# Altium PCB 555_timer.PcbDoc
Units mil, origin at the board's own origin, x right, y up, seen from the top; angles counter-clockwise.
Board outline 1210 x 595 mil, 2 copper layers (Top Layer, Bottom Layer); 7 components, 6 nets, 20 pads, 1 vias.
Unrouted connection lines stored in the file: 1.
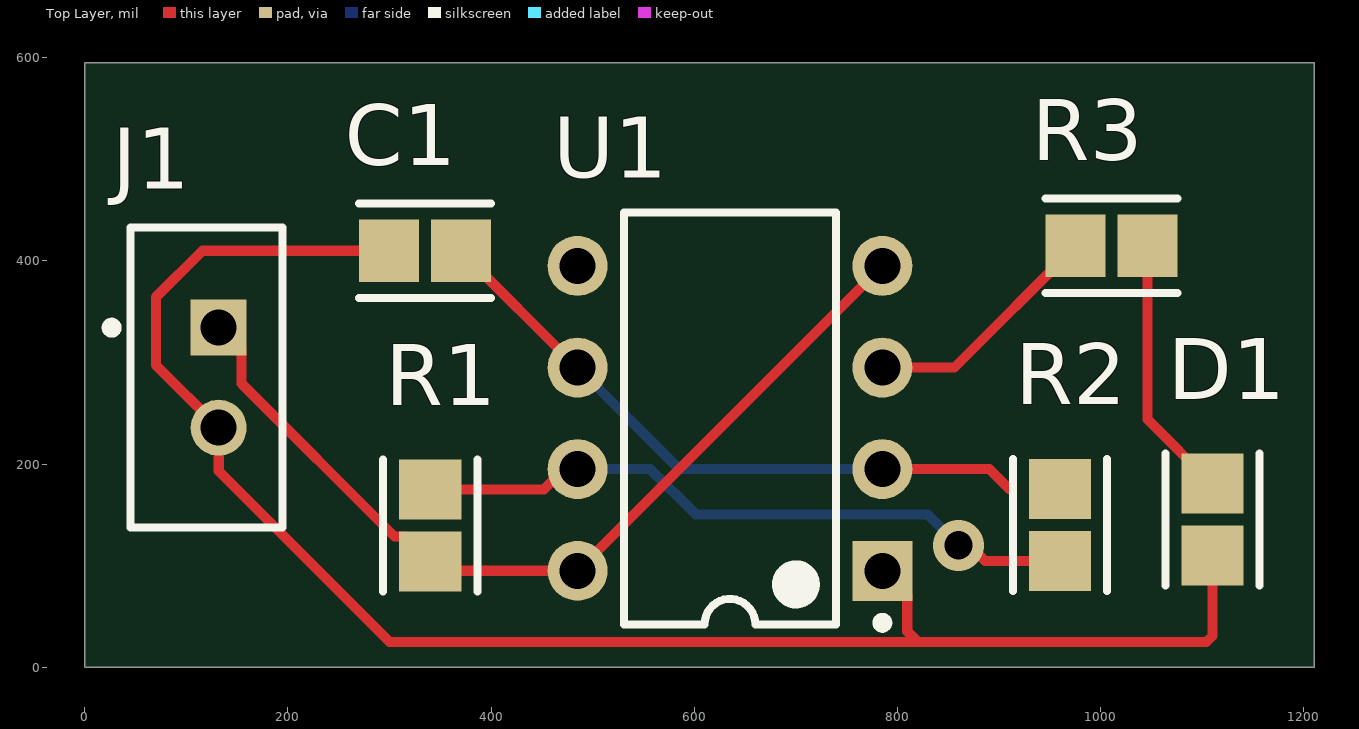
[diagram p0: Top Layer view]
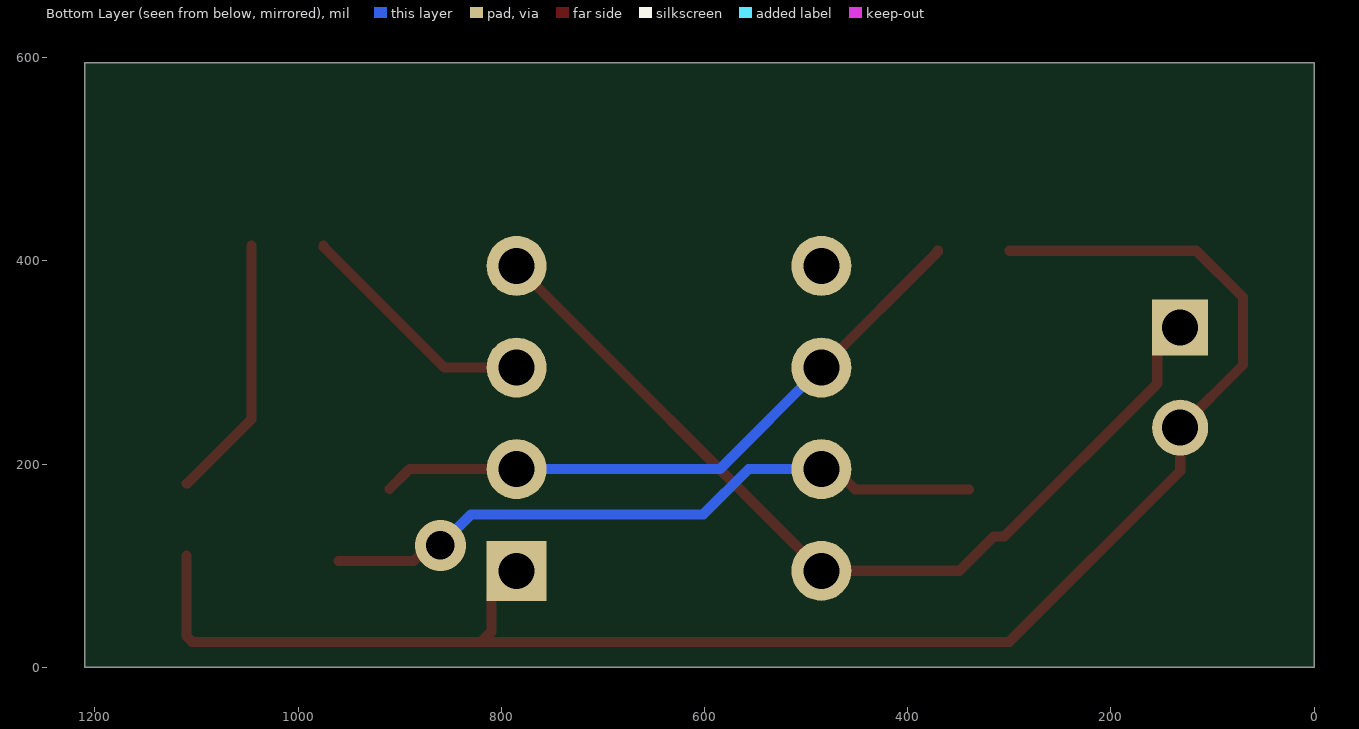
[diagram p1: Bottom Layer view, seen from below]
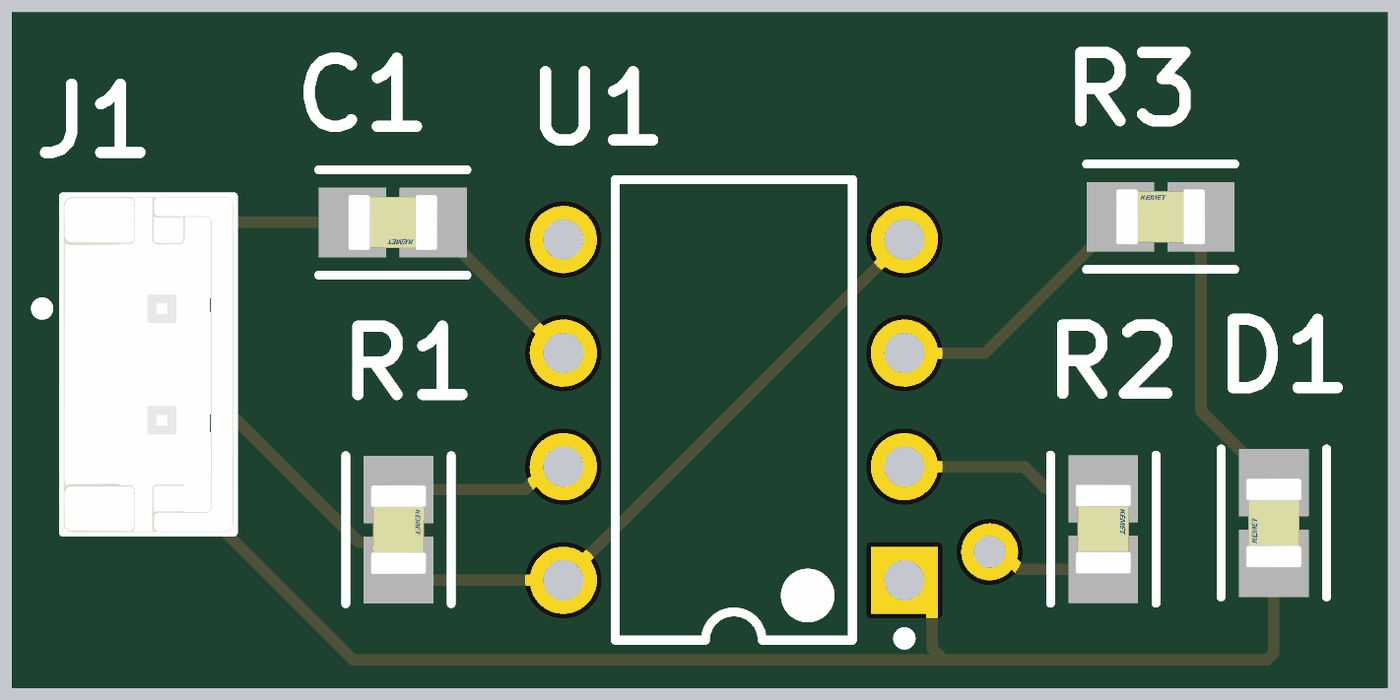
[diagram p2: 3D render of the assembled board from above, using the file's embedded part models]

## Layer stack, top to bottom
Top Solder: solder mask 0.4, Solder Resist, Dk 3.5
Top Layer: signal copper 1.4
Dielectric 1: dielectric 12.6, FR-4, Dk 4.8
Bottom Layer: signal copper 1.4
Bottom Solder: solder mask 0.4, Solder Resist, Dk 3.5

## Board outline
0,0 1210,0 1210,595 0,595

## Design rules (kind name [scope] priority, off if disabled: settings)
Clearance [All] p1: gap=10 ignorepadtopadclearanceinfootprint=FALSE except(0: Arc-Hole Track-Hole SMDPad-Hole THPad-Hole Via-Hole Fill-Hole Poly-Hole Region-Hole Text-Hole)
PolygonConnect [All] p1: connectstyle=Relief reliefconductorwidth=10 reliefentries=4 polygonreliefangle="90 Angle" airgapwidth=10
RoutingVias [All] p1: holewidth=28 width=50 viastyle="Through Hole" minholewidth=28 minwidth=50 maxholewidth=28 maxwidth=50
SolderMaskExpansion [All] p1: expansion=4 istentingtop=FALSE
Width [All] p1: maxlimit=10 minlimit=10 preferedwidth=10
30 further rules are at their usual default settings.

## Components (designator, comment, footprint, x,y, rotation, side; value= is the part's Value field where it differs from the comment)
C1 "10uF" FP-C0805C-DN-IPC_A 335,410 r180 top
D1 "Blue" FP-C0805C-DN-IPC_A 1110,145.46 r90 top
J1 "5V" FP-B2B-EH-A_LF_SN-MFG 120,285 r270 top
R1 "1k" FP-C0805C-DN-IPC_A 340,139.54 r270 top
R2 "10k" FP-C0805C-DN-IPC_A 960,140 r270 top
R3 "1k" FP-C0805C-DN-IPC_A 1010.46,415 r0 top
U1 "LM555" N08E 635,245 r180 top

## Footprints (in the part's own frame and the unit in brackets; to place one, negate y for a bottom-side part, rotate by r counter-clockwise, add the part's x,y. Pads: shape width x height; smd on the part's side, far side on the other; paste and mask are expansions set on the pad)
FP-B2B-EH-A_LF_SN-MFG [mm]
  rect 1.4x1.4 hole 0.9 paste-1000 mask+0: 1(-1.25,0.3)
  round 1.4 hole 0.9 paste-1000 mask+0: 2(1.25,0.3)
  silkscreen extent -3.75,-2.5 3.75,1.9, body extent -3.85,-2 3.85,2, height 0.25
FP-C0805C-DN-IPC_A [mil]
  rect 59.24x61.27 smd paste+0 mask+0: 1(-35.46,0) 2(35.46,0)
  silkscreen extent -65,-46 65,46, body extent -85,-50 85,50, height 10
N08E [mm] "DIP, 8-Pin, Row Spacing 7.62 mm, Pitch 2.54 mm"
  rect 1.5x1.5 hole 0.9: 1(-3.81,3.81)
  round 1.5 hole 0.9: 2(-3.81,1.27) 3(-3.81,-1.27) 4(-3.81,-3.81) 5(3.81,-3.81) 6(3.81,-1.27) 7(3.81,1.27) 8(3.81,3.81)
  silkscreen extent -3.94,-5.15 2.65,5.23, body extent -3.6,-5.15 3.6,5.15, height 5.33

## Part data
C1: library part GRM21BR61C106KE15L, "贴片电容（MLCC） 10μF ±10% 16V X5R 0805", Case Code (Imperial)=0805, Case Code (Metric)=2012, Dielectric=X5R, Manufacturer=Murata, Max Operating Temperature=85°C, Min Operating Temperature=-55°C, Package Quantity=1, Supplier Part Number 1=490-3886-1-ND, Tolerance=10%, Voltage=16V, Capacitance=10uF, Case/Package=0805, Category="Ceramic Capacitors", ComponentLink1Description=https://datasheet.ciiva.com/7719/1747468-7719090.pdf?src-supplier=Element14, ComponentLink1URL=https://datasheet.ciiva.com/7719/1747468-7719090.pdf?src-supplier=Element14, ComponentLink2Description=https://datasheet.ciiva.com/23628/460993-23628598.pdf?src-supplier=Newark, ComponentLink2URL=https://datasheet.ciiva.com/23628/460993-23628598.pdf?src-supplier=Newark, ComponentLink3Description=https://datasheet.ciiva.com/2989/product-2989696.pdf?src-supplier=Avnet, ComponentLink3URL=https://datasheet.ciiva.com/2989/product-2989696.pdf?src-supplier=Avnet, ComponentLink4Description=https://datasheet.ciiva.com/3777/1956grm21br61c106ke1523-3777137.pdf?src-supplier=Arrow+Electronics, ComponentLink4URL=https://datasheet.ciiva.com/3777/1956grm21br61c106ke1523-3777137.pdf?src-supplier=Arrow+Electronics, ComponentLink5Description=https://datasheet.ciiva.com/29202/450891-da-01-de-vs-chip-kond-0805-10-0-uf-10pr-16-0v-x5r-29202696.pdf?src-supplier=Conrad, ComponentLink5URL=https://datasheet.ciiva.com/29202/450891-da-01-de-vs-chip-kond-0805-10-0-uf-10pr-16-0v-x5r-29202696.pdf?src-supplier=Conrad, ComponentLink6Description=https://datasheet.ciiva.com/29199/454607-da-01-en-vs-kondensator-0805-29199611.pdf?src-supplier=Conrad, ComponentLink6URL=https://datasheet.ciiva.com/29199/454607-da-01-en-vs-kondensator-0805-29199611.pdf?src-supplier=Conrad, ComponentLink7Description=https://datasheet.ciiva.com/137/partnumbering-e-01-137918.pdf?src-supplier=Digi-Key, ComponentLink7URL=https://datasheet.ciiva.com/137/partnumbering-e-01-137918.pdf?src-supplier=Digi-Key, ComponentLink8Description=https://datasheet.ciiva.com/137/partnumbering-e-01-137917.pdf?src-supplier=Digi-Key, ComponentLink8URL=https://datasheet.ciiva.com/137/partnumbering-e-01-137917.pdf?src-supplier=Digi-Key, ComponentLink9Description=https://datasheet.ciiva.com/137/partnumbering-e-01-137919.pdf?src-supplier=Digi-Key, ComponentLink9URL=https://datasheet.ciiva.com/137/partnumbering-e-01-137919.pdf?src-supplier=Digi-Key, ComponentLink10Description=https://datasheet.ciiva.com/2989/product-2989697.pdf?src-supplier=Avnet, ComponentLink10URL=https://datasheet.ciiva.com/2989/product-2989697.pdf?src-supplier=Avnet, Construction=Flat, Depth=1.25mm, Height=1.25mm, Lead Free="Lead Free", Length=2mm, Manufacturer Part Number=GRM21BR61C106KE15L, Material=Ceramic, Mount="Surface Mount", Packaging="Tape and Reel", Pricing 1="1=0.18000, 10=0.12400, 50=0.07420, 100=0.06270, 500=0.04292, 1000=0.03798 (USD)", Radiation Hardening=No, REACH SVHC="No SVHC", RoHS=Yes, RoHS Compliant=Yes, Series=GRM, Stock 1=9508002, Supplier 1=Digi-Key, Termination=SMD/SMT, Thickness=0.053inch, Voltage Rating=16V, Voltage Rating (DC)=16V, Width=1.25mm
D1: library part LTST-C170TBKT, "LED BLUE CLEAR 0805 SMD", Case Code (Imperial)=0805, Case Code (Metric)=2012, Forward Current=20mA, Forward Voltage=3.8V, Lens Color=Colorless, Manufacturer="Vishay Lite-On", Max Operating Temperature=80°C, Min Operating Temperature=-20°C, Package Quantity=1, Power Dissipation=76mW, Reverse Voltage=5V, Supplier Part Number 1=160-1579-1-ND, Case/Package=0805, Category=LEDs, Color=Blue, ComponentLink1Description=https://datasheet.ciiva.com/27055/1996161-27055955.pdf?src-supplier=Jameco, ComponentLink1URL=https://datasheet.ciiva.com/27055/1996161-27055955.pdf?src-supplier=Jameco, ComponentLink2Description=https://datasheet.ciiva.com/11773/0900766b80dc0281-11773879.pdf?src-supplier=RSComponents, ComponentLink2URL=https://datasheet.ciiva.com/11773/0900766b80dc0281-11773879.pdf?src-supplier=RSComponents, ComponentLink3Description=https://datasheet.ciiva.com/12400/lite-on-ltst-c170tbkt-190169-12400787.pdf?src-supplier=Mouser, ComponentLink3URL=https://datasheet.ciiva.com/12400/lite-on-ltst-c170tbkt-190169-12400787.pdf?src-supplier=Mouser, ComponentLink4Description=https://datasheet.ciiva.com/16199/lite-on20ltst-c170tbkt-16199611.pdf?src-supplier=Future+Electronics, ComponentLink4URL=https://datasheet.ciiva.com/16199/lite-on20ltst-c170tbkt-16199611.pdf?src-supplier=Future+Electronics, ComponentLink5Description=https://datasheet.ciiva.com/15117/getdatasheetpartid-103986-15117447.pdf?src-supplier=Verical, ComponentLink5URL=https://datasheet.ciiva.com/15117/getdatasheetpartid-103986-15117447.pdf?src-supplier=Verical, ComponentLink6Description=https://datasheet.ciiva.com/25764/ltst-c170tbkt-25764828.pdf?src-supplier=Allied+Electronics, ComponentLink6URL=https://datasheet.ciiva.com/25764/ltst-c170tbkt-25764828.pdf?src-supplier=Allied+Electronics, ComponentLink7Description=https://datasheet.ciiva.com/2110/s-110-ltst-c170tbkt-2110489.pdf?src-supplier=Digi-Key, ComponentLink7URL=https://datasheet.ciiva.com/2110/s-110-ltst-c170tbkt-2110489.pdf?src-supplier=Digi-Key, ComponentLink8Description=https://datasheet.ciiva.com/2110/s-110-ltst-c170tbkt-2110488.pdf?src-supplier=Digi-Key, ComponentLink8URL=https://datasheet.ciiva.com/2110/s-110-ltst-c170tbkt-2110488.pdf?src-supplier=Digi-Key, ComponentLink9Description=https://datasheet.ciiva.com/2110/s-110-ltst-c170tbkt-2110490.pdf?src-supplier=Digi-Key, ComponentLink9URL=https://datasheet.ciiva.com/2110/s-110-ltst-c170tbkt-2110490.pdf?src-supplier=Digi-Key, Depth=1.25mm, Dominant Wavelength=475nm, Height=1.1mm, Illumination Color=Blue, Lead Free="Lead Free", Length=2mm, Lens Style=Diffused,Colorless,Clear,Rectangular, Lens Transparency=Clear, Luminous Intensity=180mcd, Manufacturer Part Number=LTST-C170TBKT, Mount="Surface Mount", Number of Elements=1, Number of LEDs=1, Number of Pins=2, Packaging="Tape and Reel", Power Rating=76mW, Pricing 1="1=0.36000, 10=0.23900, 100=0.15930, 500=0.11016, 1000=0.09180 (USD)", Radiation Hardening=No, RoHS=Yes, RoHS Compliant=Yes, Series=-, Stock 1=153274, Supplier 1=Digi-Key, Test Current=20mA, Viewing Angle=130°, Wavelength=468nm, Width=1.25mm
J1: library part B2B-EH-A(LF)(SN), "CONN HEADER EH TOP 2POS 2.5MM", Color=Natural, Contact Resistance=20mR, Current Rating=3A, Housing Color=White, Manufacturer=JST, Max Operating Temperature=85°C, Max Voltage Rating (AC)=250V, Min Operating Temperature=-25°C, Supplier Part Number 1=455-1611-ND, Category="Headers and Wire Housings", ComponentLink1Description=https://datasheet.ciiva.com/26924/getdatasheetpartid-639961-26924027.pdf?src-supplier=Verical, ComponentLink1URL=https://datasheet.ciiva.com/26924/getdatasheetpartid-639961-26924027.pdf?src-supplier=Verical, ComponentLink2Description=https://datasheet.ciiva.com/11746/0900766b805aab1f-11746167.pdf?src-supplier=RSComponents, ComponentLink2URL=https://datasheet.ciiva.com/11746/0900766b805aab1f-11746167.pdf?src-supplier=RSComponents, ComponentLink3Description=https://datasheet.ciiva.com/41451/001217319-da-01-en-stiftleiste-gerade-2-pol-rm-25mm-41451366.pdf?src-supplier=Conrad, ComponentLink3URL=https://datasheet.ciiva.com/41451/001217319-da-01-en-stiftleiste-gerade-2-pol-rm-25mm-41451366.pdf?src-supplier=Conrad, ComponentLink4Description=https://datasheet.ciiva.com/16449/b2b-eh-alfsn-16449468.pdf?src-supplier=Future+Electronics, ComponentLink4URL=https://datasheet.ciiva.com/16449/b2b-eh-alfsn-16449468.pdf?src-supplier=Future+Electronics, ComponentLink5Description=https://datasheet.ciiva.com/712/eeh-712441.pdf?src-supplier=Digi-Key, ComponentLink5URL=https://datasheet.ciiva.com/712/eeh-712441.pdf?src-supplier=Digi-Key, Connector Type=Plug, Contact Material="Copper Alloy,Brass", Contact Mating Length=0.13inch, Contact Plating=Tin,Copper, Contact Type="Male Pin", Depth=3.8mm, Fastening Type=Detent, Gender=Male, Housing Material=Nylon, Lead Free="Lead Free", Length=7.5mm, Manufacturer Part Number=B2B-EH-A(LF)(SN), Max Current Rating=3A, Mount="Through Hole", Number of Contacts=2, Number of Positions=2, Number of Rows=1, Orientation=Straight, Packaging=Bulk, Pitch=2.5mm, Pricing 1="1=0.14000, 10=0.11000, 100=0.08090, 500=0.06698, 1000=0.05861, 5000=0.05024, 10000=0.04884 (USD)", RoHS=Yes, Series=EH, Supplier 1=Digi-Key, Termination=Press-Fit, Voltage Rating=250V
R1 R3: library part CRCW08051K00FKEA, "Res Thick Film 0805 1K Ohm 1% 1/8W ±100ppm/°C Molded SMD Paper T/R", Case Code (Imperial)=0805, Case Code (Metric)=2012, Manufacturer="Vishay Dale", Max Operating Temperature=155°C, Max Power Dissipation=125mW, Min Operating Temperature=-55°C, Package Quantity=5000, Resistance=1kR, Resistance Tolerance=1%, Resistor Type="Thick Film", Supplier Part Number 1=541-1.00KCDKR-ND, Temperature Coefficient=100ppm/°C, Voltage Rating=150V, Case/Package=0805, Category="Chip SMD Resistors", ComponentLink1Description=https://datasheet.ciiva.com/11808/0900766b80d98b26-11808530.pdf?src-supplier=RSComponents, ComponentLink1URL=https://datasheet.ciiva.com/11808/0900766b80d98b26-11808530.pdf?src-supplier=RSComponents, ComponentLink2Description=https://datasheet.ciiva.com/3258/dcrcwe3-3258215.pdf?src-supplier=Avnet, ComponentLink2URL=https://datasheet.ciiva.com/3258/dcrcwe3-3258215.pdf?src-supplier=Avnet, ComponentLink3Description=https://datasheet.ciiva.com/26312/fld-crcw-e3-data-en-26312922.pdf?src-supplier=Distrelec, ComponentLink3URL=https://datasheet.ciiva.com/26312/fld-crcw-e3-data-en-26312922.pdf?src-supplier=Distrelec, ComponentLink4Description=https://datasheet.ciiva.com/16213/dcrcwe3-16213643.pdf?src-supplier=Future+Electronics, ComponentLink4URL=https://datasheet.ciiva.com/16213/dcrcwe3-16213643.pdf?src-supplier=Future+Electronics, ComponentLink5Description=https://datasheet.ciiva.com/46381/1697337-46381606.pdf?src-supplier=Element14, ComponentLink5URL=https://datasheet.ciiva.com/46381/1697337-46381606.pdf?src-supplier=Element14, ComponentLink6Description=https://datasheet.ciiva.com/46441/1720486-46441626.pdf?src-supplier=Element14, ComponentLink6URL=https://datasheet.ciiva.com/46441/1720486-46441626.pdf?src-supplier=Element14, Construction=Rectangular, Contact Plating=Tin, Depth=1.25mm, Features="Automotive AEC-Q200", Height=0.45mm, Lead Free="Lead Free", Length=2mm, Manufacturer Part Number=CRCW08051K00FKEA, Military Standard=Not, Number of Pins=2, Number of Terminations=2, Packaging="Tape and Reel", Power Rating=125mW, Pricing 1="1=0.10000, 10=0.06700, 100=0.02710, 1000=0.01219, 2500=0.01058 (USD)", Radiation Hardening=No, REACH SVHC=Unknown, RoHS=Yes, RoHS Compliant=Yes, Series=CRCW, Size Code=0805, Stock 1=6505, Supplier 1=Digi-Key, Technology="THICK FILM", Termination=SMD/SMT, Tolerance=1%, Voltage Rating (DC)=150V, Weight=0.000194oz, Width=1.25mm
R2: library part CRCW080510K0FKEA, "Res Thick Film 0805 10K Ohm 1% 1/8W ±100ppm/°C Molded SMD Paper T/R", Case Code (Imperial)=0805, Case Code (Metric)=2012, Manufacturer=Vishay, Max Operating Temperature=155°C, Max Power Dissipation=125mW, Min Operating Temperature=-55°C, Package Quantity=5000, Resistance=10kR, Resistance Tolerance=1%, Resistor Type="Thick Film", Supplier Part Number 1=541-10.0KCDKR-ND, Temperature Coefficient=100ppm/°C, Voltage Rating=150V, Case/Package=0805, Category="Chip SMD Resistors", ComponentLink1Description=https://datasheet.ciiva.com/11808/0900766b80d98b26-11808216.pdf?src-supplier=RSComponents, ComponentLink1URL=https://datasheet.ciiva.com/11808/0900766b80d98b26-11808216.pdf?src-supplier=RSComponents, ComponentLink2Description=https://datasheet.ciiva.com/46394/1720486-46394381.pdf?src-supplier=Element14, ComponentLink2URL=https://datasheet.ciiva.com/46394/1720486-46394381.pdf?src-supplier=Element14, ComponentLink3Description=https://datasheet.ciiva.com/16719/70201119-16719082.pdf?src-supplier=Allied+Electronics, ComponentLink3URL=https://datasheet.ciiva.com/16719/70201119-16719082.pdf?src-supplier=Allied+Electronics, ComponentLink4Description=https://datasheet.ciiva.com/16755/70201119-16755389.pdf?src-supplier=Allied+Electronics, ComponentLink4URL=https://datasheet.ciiva.com/16755/70201119-16755389.pdf?src-supplier=Allied+Electronics, ComponentLink5Description=https://datasheet.ciiva.com/5547/dcrcwe3-109170-5547559.pdf?src-supplier=Mouser, ComponentLink5URL=https://datasheet.ciiva.com/5547/dcrcwe3-109170-5547559.pdf?src-supplier=Mouser, ComponentLink6Description=https://datasheet.ciiva.com/8337/dcrcwe3-8337773.pdf?src-supplier=Avnet, ComponentLink6URL=https://datasheet.ciiva.com/8337/dcrcwe3-8337773.pdf?src-supplier=Avnet, ComponentLink7Description=https://datasheet.ciiva.com/16199/dcrcwe3-16199086.pdf?src-supplier=Future+Electronics, ComponentLink7URL=https://datasheet.ciiva.com/16199/dcrcwe3-16199086.pdf?src-supplier=Future+Electronics, ComponentLink8Description=https://datasheet.ciiva.com/8337/dcrcwe3-8337774.pdf?src-supplier=Avnet, ComponentLink8URL=https://datasheet.ciiva.com/8337/dcrcwe3-8337774.pdf?src-supplier=Avnet, Construction=Rectangular, Contact Plating=Tin, Depth=1.25mm, Features="Automotive AEC-Q200", Height=0.45mm, Lead Free="Lead Free", Length=2mm, Manufacturer Part Number=CRCW080510K0FKEA, Military Standard=Not, Number of Terminations=2, Packaging="Tape and Reel", Power Rating=125mW, Pricing 1="1=0.10000, 10=0.06700, 100=0.02710, 1000=0.01219, 2500=0.01058 (USD)", Radiation Hardening=No, REACH SVHC=Unknown, RoHS=Yes, RoHS Compliant=Yes, Series=CRCW, Size Code=0805, Supplier 1=Digi-Key, Technology="THICK FILM", Termination=SMD/SMT, Tolerance=1%, Voltage Rating (DC)=150V, Weight=0.000194oz, Width=1.25mm
U1: library part LM555CN, "LM555 Series 16 V 7.5 mA Monolithic General Purpose Single Timer - DIP-8", Case/Package=PDIP, Current Rating=15A, Frequency=100kHz, High Level Output Current=-200mA, Low Level Output Current=200mA, Manufacturer="TI National Semiconductor", Max Operating Temperature=70°C, Max Power Dissipation=1.18W, Max Supply Voltage=16V, Min Operating Temperature=0°C, Min Supply Voltage=4.5V, Nominal Supply Current=3mA, Operating Supply Current=10mA, Package Quantity=40, Supplier Part Number 1=LM555CN-ND, Category="Timers and Oscillators", ComponentLink1Description=https://datasheet.ciiva.com/1139/55410-1139386.pdf?src-supplier=Element14, ComponentLink1URL=https://datasheet.ciiva.com/1139/55410-1139386.pdf?src-supplier=Element14, ComponentLink2Description=https://datasheet.ciiva.com/14274/lm555-14274455.pdf?src-supplier=Avnet, ComponentLink2URL=https://datasheet.ciiva.com/14274/lm555-14274455.pdf?src-supplier=Avnet, ComponentLink3Description=https://datasheet.ciiva.com/15152/getdatasheetpartid-647179-15152582.pdf?src-supplier=Verical, ComponentLink3URL=https://datasheet.ciiva.com/15152/getdatasheetpartid-647179-15152582.pdf?src-supplier=Verical, ComponentLink4Description=https://datasheet.ciiva.com/6667/lm555-6667629.pdf?src-supplier=Digi-Key, ComponentLink4URL=https://datasheet.ciiva.com/6667/lm555-6667629.pdf?src-supplier=Digi-Key, Lead Free="Lead Free", Manufacturer Part Number=LM555CN, Mount="Through Hole", Number of Channels=1, Number of Pins=8, Number of Timers/Counters=1, Output Current=200mA, Packaging=Rail/Tube, Power Dissipation=1.18W, Quiescent Current=3mA, Radiation Hardening=No, REACH SVHC="No SVHC", RoHS=No, RoHS Compliant=No, Series=LM555, Supplier 1=Digi-Key, Supply Current=3mA

## Via types
v1: diameter 50, hole 28, Top Layer to Bottom Layer, 1 vias

## Nets (pads, with @x,y where several pads share a name; then routed paths per layer and width w, separated by ;. In a path a pad name is that pad's centre, name@x,y a point inside that pad or via, vN(x,y) a via of type N, cw(c..) or ccw(c..) an arc to the next point about the centre after c; other vN are vias at no path point)
GND: C1.2 D1.1 J1.2 U1.1 | length 1659
  Top Layer w10: C1.2 115.86,410 70,364.14 70,297.6 J1.2 131.81,193.19 300,25 820,25 ; U1.1 809.53,70.47 809.53,35.47 820,25 ; D1.1 1110,30.86 1104.14,25 820,25
NetC1_1: C1.1 R2.1 U1.2 U1.6 | length 637.3
  Top Layer w10: C1.1 370.46,408.98 484.45,295 U1.6 ; U1.2 890.46,195 910,175.46
  Bottom Layer w10: U1.6 585,195 U1.2
NetD1_2: D1.2 R3.2 | length 261.2
  Top Layer w10: R3.2 1045.93,243.98 1108.98,180.93 D1.2
NetR1_1: R1.1 R2.2 U1.7 | length 665.8
  Top Layer w10: R1.1 451.73,175 471.73,195 U1.7 ; v1(860,120) 870.82,120 886.29,104.54 R2.2
  Bottom Layer w10: U1.7 556.72,195 601.24,150.47 829.53,150.47 v1(860,120)
NetR3_1: R3.1 U1.3 | length 240.3
  Top Layer w10: U1.3 856.02,295 975,413.98 R3.1
VCC: J1.1 R1.2 U1.4 U1.8 | length 895.6
  Top Layer w10: J1.1 154.37,311.65 154.37,279.16 304.84,128.69 315.38,128.69 R1.2 349.07,95 U1.8 U1.4
pads on no net: U1.5